# EAGLE board GEYDi_BRD (EAGLE 4.09)
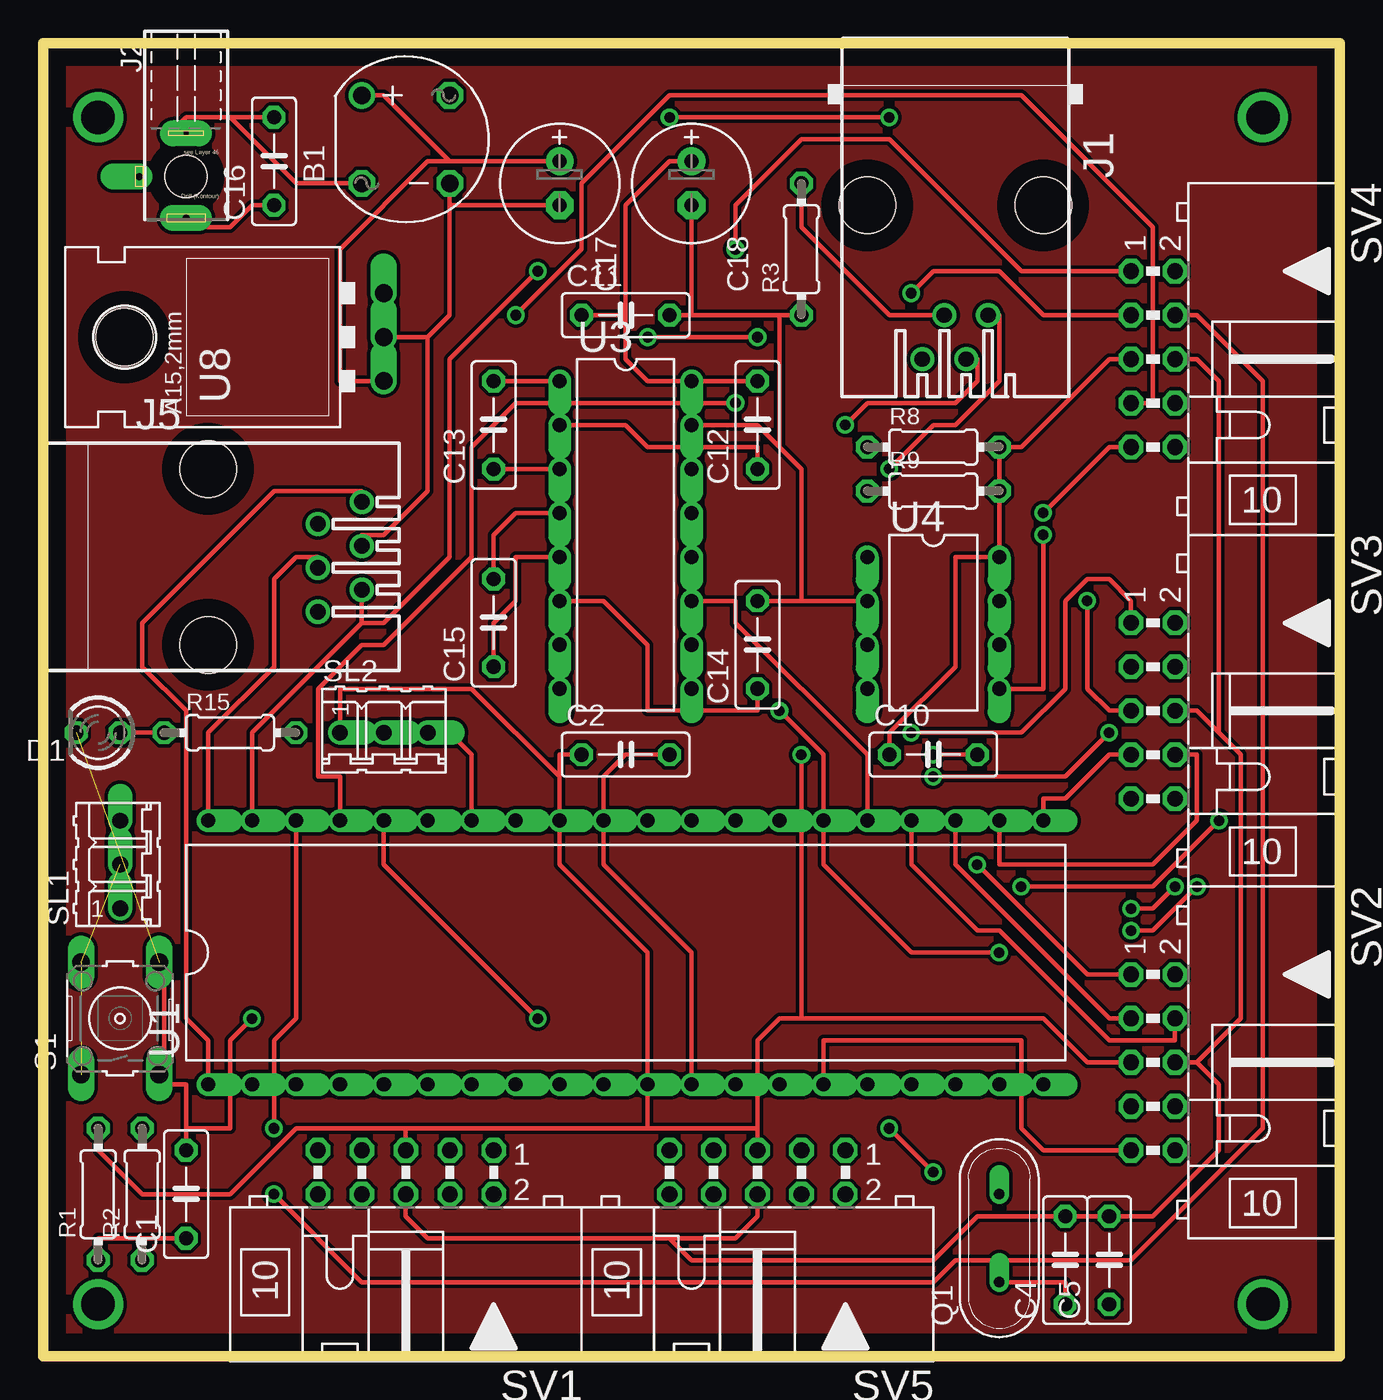
[diagram p0: board, top side]
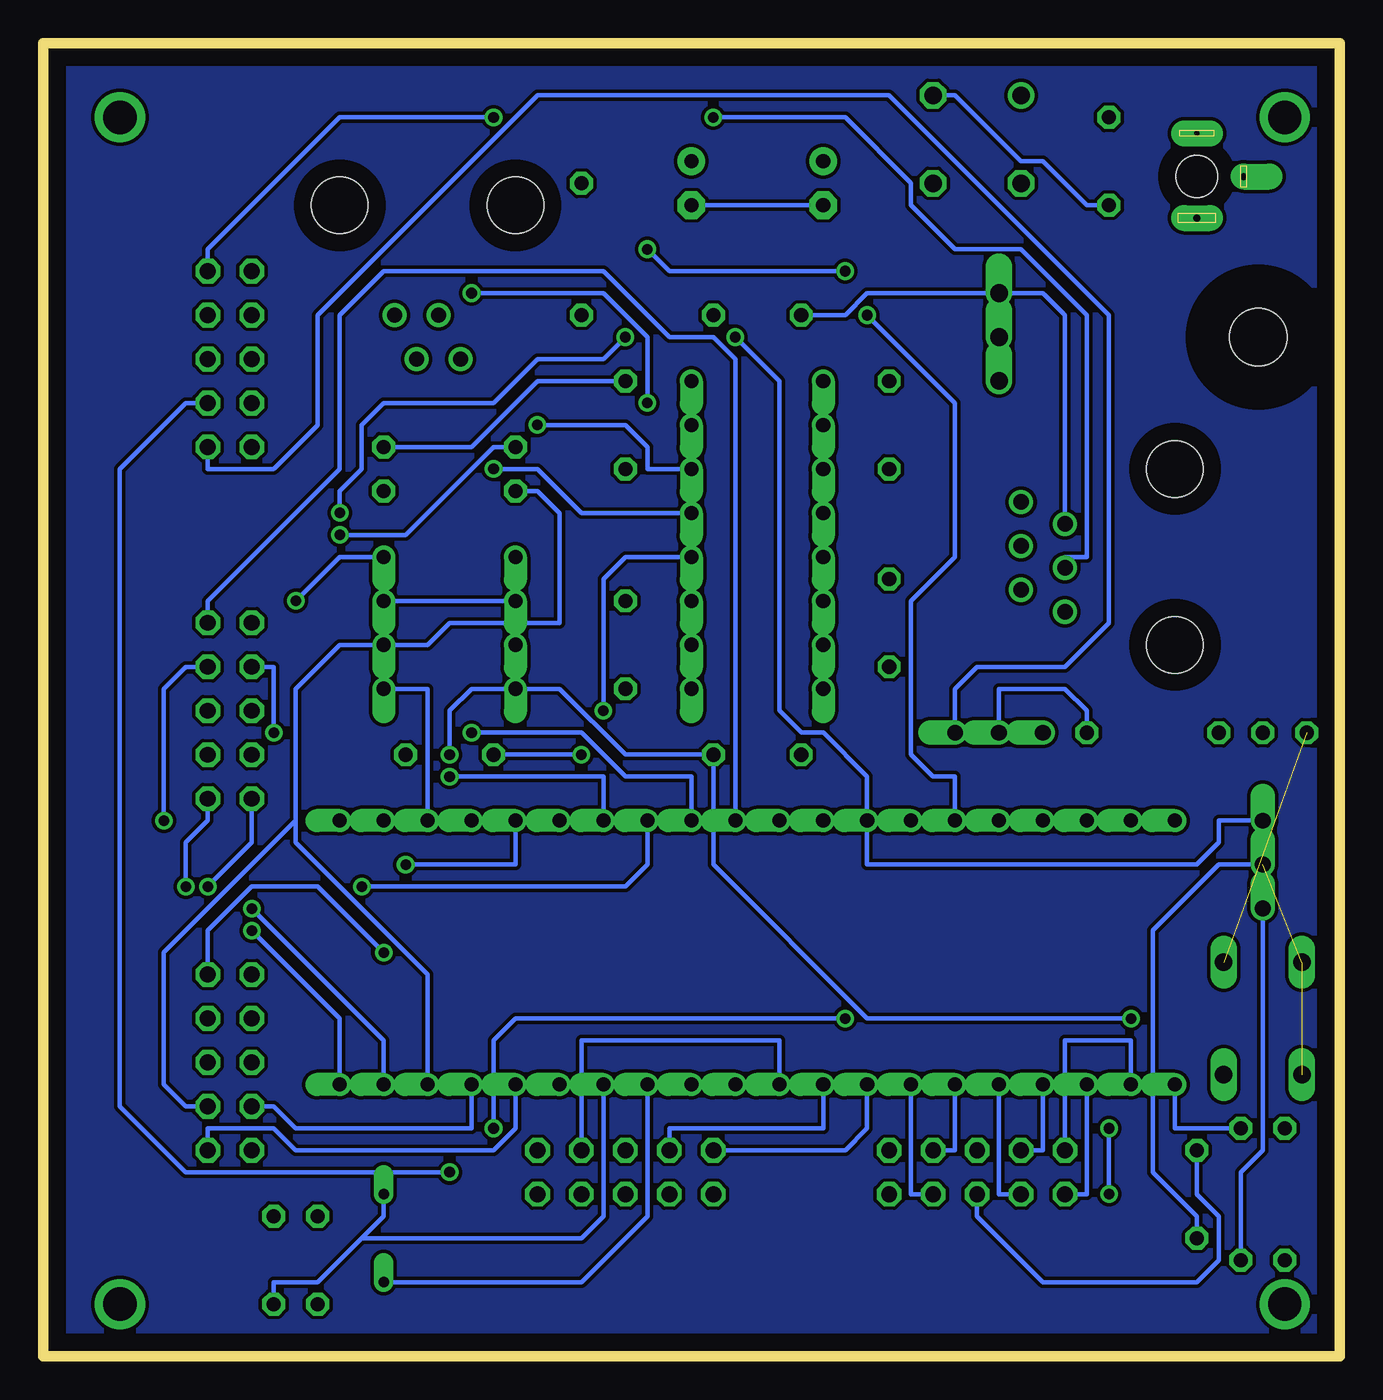
[diagram p1: board, bottom side, seen from below]

Size 74.91 x 75.87 mm. Coordinates in mm from the lower left corner, seen from the top.
Outline: 0,0 74.91,0 74.91,75.87 0,75.87 0,0
Copper layers used: Top, Bottom

## Footprints (pad centres in the part's own frame; a part is rotated, then mirrored left to right if it is on the bottom)
RB1A = drill 1.016 round: + -2.54,2.54 | drill 1.016 octagon: - 2.54,-2.54; AC1 2.54,2.54; AC2 -2.54,-2.54
C050-025X075 = drill 0.813 octagon: 1 -2.54,0; 2 2.54,0
E2,5-7 = drill 0.813 pad 1.6 round: + -1.27,0 | drill 0.813 pad 1.6 octagon: - 1.27,0
LED3MM = drill 0.813 octagon: A -1.27,0; K 1.27,0
520250-2 = drill 0.889 round: 1 -1.905,6.35; 2 -0.635,8.89; 3 0.635,6.35; 4 1.905,8.89 | hole 3.251: -5.08,0; 5.08,0
733989-5 = drill 0.4 pad 1.5 long: 1 0,5.82 | drill 0.3 pad 1.5 long: 2 0,0.92 | drill 0.4 pad 1.5 offset: 3 2.7,3.42 | hole 2.4: 0,3.42
520470-3 = drill 0.889 round: 1 -3.175,8.89; 2 -1.905,6.35; 3 -0.635,8.89; 4 0.635,6.35; 5 1.905,8.89; 6 3.175,6.35 | hole 3.251: -5.08,0; 5.08,0
QS = drill 0.61 offset: 1 -2.54,0; 2 2.54,0
0204/7 = drill 0.813 octagon: 1 -3.81,0; 2 3.81,0
B3F-10XX = drill 1.016 long: 1 -3.251,2.261; 2 3.251,2.261; 3 -3.251,-2.261; 4 3.251,-2.261
03P = drill 0.914 offset: 1 -2.54,0; 2 0,0; 3 2.54,0
ML10L = drill 0.914 octagon: 1 -5.08,-1.27; 2 -5.08,1.27; 3 -2.54,-1.27; 4 -2.54,1.27; 5 0,-1.27; 6 0,1.27; 7 2.54,-1.27; 8 2.54,1.27; 9 5.08,-1.27; 10 5.08,1.27
DIL40 = drill 0.813 offset: 1 -24.13,-7.62; 2 -21.59,-7.62; 3 -19.05,-7.62; 4 -16.51,-7.62; 5 -13.97,-7.62; 6 -11.43,-7.62; 7 -8.89,-7.62; 8 -6.35,-7.62; 9 -3.81,-7.62; 10 -1.27,-7.62; 11 1.27,-7.62; 12 3.81,-7.62; 13 6.35,-7.62; 14 8.89,-7.62; 15 11.43,-7.62; 16 13.97,-7.62; 17 16.51,-7.62; 18 19.05,-7.62; 19 21.59,-7.62; 20 24.13,-7.62; 21 24.13,7.62; 22 21.59,7.62; 23 19.05,7.62; 24 16.51,7.62; 25 13.97,7.62; 26 11.43,7.62; 27 8.89,7.62; 28 6.35,7.62; 29 3.81,7.62; 30 1.27,7.62; 31 -1.27,7.62; 32 -3.81,7.62; 33 -6.35,7.62; 34 -8.89,7.62; 35 -11.43,7.62; 36 -13.97,7.62; 37 -16.51,7.62; 38 -19.05,7.62; 39 -21.59,7.62; 40 -24.13,7.62
DIL16 = drill 0.813 offset: 1 -8.89,-3.81; 2 -6.35,-3.81; 3 -3.81,-3.81; 4 -1.27,-3.81; 5 1.27,-3.81; 6 3.81,-3.81; 7 6.35,-3.81; 8 8.89,-3.81; 9 8.89,3.81; 10 6.35,3.81; 11 3.81,3.81; 12 1.27,3.81; 13 -1.27,3.81; 14 -3.81,3.81; 15 -6.35,3.81; 16 -8.89,3.81
DIL8 = drill 0.813 offset: 1 -3.81,-3.81; 2 -1.27,-3.81; 3 1.27,-3.81; 4 3.81,-3.81; 5 3.81,3.81; 6 1.27,3.81; 7 -1.27,3.81; 8 -3.81,3.81
78XXL = drill 1.016 offset: GND 0,-3.81; IN -2.54,-3.81; OUT 2.54,-3.81 | hole 3.302: 0,11.176

## Placement (x,y rotation side)
B1  [RB1A]  20.95,70.32 0 top
C1  0.1uF  [C050-025X075]  8.25,9.36 90 top
C2  0.1uF  [C050-025X075]  33.65,34.76 0 top
C4  15pF  [C050-025X075]  59.05,5.55 90 top
C5  15pF  [C050-025X075]  61.59,5.55 90 top
C10  0.1uF  [C050-025X075]  51.43,34.76 0 top
C11  0.1uF  [C050-025X075]  33.65,60.16 0 top
C12  0.1uF  [C050-025X075]  41.27,53.81 90 top
C13  0.1uF  [C050-025X075]  26.03,53.81 90 top
C14  0.1uF  [C050-025X075]  41.27,41.11 90 top
C15  0.1uF  [C050-025X075]  26.03,42.38 90 top
C16  0.1uF  [C050-025X075]  13.33,69.05 90 top
C17  220uF  [E2,5-7]  29.84,67.78 270 top
C18  220uF  [E2,5-7]  37.46,67.78 270 top
D1  [LED3MM]  3.17,36.03 180 top
J1  [520250-2]  52.7,66.51 180 top
J2  [733989-5]  8.25,71.59 180 top
J5  [520470-3]  9.52,46.19 270 top
Q1  [QS]  55.24,6.82 90 top
R1  10k  [0204/7]  3.17,9.36 90 top
R2  470  [0204/7]  5.71,9.36 90 top
R3  10ohm  [0204/7]  43.81,63.97 90 top
R8  [0204/7]  51.43,52.54 0 top
R9  4.7k  [0204/7]  51.43,50 0 top
R15  470  [0204/7]  10.79,36.03 0 top
S1  [B3F-10XX]  4.44,19.52 90 top
SL1  [03P]  4.44,28.41 90 top
SL2  [03P]  19.68,36.03 0 top
SV1  [ML10L]  20.95,10.63 180 top
SV2  [ML10L]  64.13,16.98 270 top
SV3  [ML10L]  64.13,37.3 270 top
SV4  [ML10L]  64.13,57.62 270 top
SV5  [ML10L]  41.27,10.63 180 top
U1  PIC18F452P  [DIL40]  33.65,23.33 0 top
U3  MAX232  [DIL16]  33.65,47.46 270 top
U4  24AA256P  [DIL8]  51.43,42.38 270 top
U8  7805  [78XXL]  15.87,58.89 90 top

## Library data of the parts
B1 = rectifier
C1 C2 C4 C5 C10-C18 R1-R3 R8 R9 R15 = rcl
D1 = led
J1 J5 = con-amp
J2 = con-conrad
Q1 = special
S1 = switch-omron
SL1 SL2 = con-amp-quick
SV1-SV5 = con-harting-ml
U1 U4 = microchip
U3 = maxim
U8 = v-reg

## Nets
+5V: C2.1 C10.1 C11.1 C12.2 C18.+ J5.2 R1.2 R8.2 R9.2 SL2.1 SV1.5 SV2.5 SV3.5 SV4.5 SV5.5 U1.11 U1.32 U3.16 U4.8 U8.OUT
GND: B1.- C1.2 C2.2 C4.2 C5.2 C10.2 C11.2 C14.2 C17.- C18.- D1.K J5.3 R3.1 S1.3 S1.4 SV1.6 SV2.6 SV3.6 SV4.6 SV5.6 U1.12 U1.31 U3.15 U4.1 U4.2 U4.3 U4.4 U4.7 U8.GND
MCLR: J5.1 R2.2 U1.1
N$1: D1.A R15.1
N$2: B1.AC2 C16.2 J2.2
N$3: B1.AC1 C16.1 J2.1
N$4: C12.1 U3.2
N$5: C13.2 U3.1
N$6: B1.+ C17.+ U8.IN
N$7: C1.1 R1.1 S1.1 S1.2 SL1.2
N$8: C5.1 Q1.2 U1.14
N$9: C4.1 Q1.1 U1.13
N$10: C13.1 U3.3
N$11: C15.2 U3.4
N$12: C15.1 U3.5
N$14: C14.1 U3.6
N$19: J1.1 U3.13
N$21: J1.2 U3.14
N$22: J1.3 R3.2
N$23: R2.1 SL1.1
N$24: R15.2 SL2.2
RA0: SV1.9 U1.2
RA1: SV1.10 U1.3
RA2: SV1.7 U1.4
RA3: SV1.8 U1.5
RA4: SV1.3 U1.6
RA5: SV1.4 U1.7
RB0: SL1.3 SV4.9 U1.33
RB1: SL2.3 SV4.10 U1.34
RB2: SV4.7 U1.35
RB3: SV4.8 U1.36
RB4: SV4.3 U1.37
RB5: SV4.4 U1.38
RB6: J5.5 SV4.1 U1.39
RB7: J5.4 SV4.2 U1.40
RC0: SV2.9 U1.15
RC1: SV2.10 U1.16
RC2: SV2.7 U1.17
RC5: SV2.4 U1.24
RD0: SV3.9 U1.19
RD1: SV3.10 U1.20
RD2: SV3.7 U1.21
RD3: SV3.8 U1.22
RD4: SV3.3 U1.27
RD5: SV3.4 U1.28
RD6: SV3.1 U1.29
RD7: SV3.2 U1.30
RE0: SV5.9 U1.8
RE1: SV5.7 U1.9
RE2: SV5.3 U1.10
RX: SV2.2 U1.26 U3.12
SCL: R9.1 SV2.8 U1.18 U4.6
SDA: R8.1 SV2.3 U1.23 U4.5
TX: SV2.1 U1.25 U3.11

## Tracks (layer width: path | path; a pad name or v marks a point on that pad's centre or on a via)
+5V  (via drill 0.61)
  Top 0.254: C10.1 48.89,36.03 52.7,39.84 52.7,46.19 U4.8 R9.2 R8.2 56.51,52.54 61.59,57.62 SV4.5 | SV3.5 61.59,37.3 60.32,38.57 v60.32,43.65 | C12.2 U3.16 34.92,56.35 33.65,57.62 33.65,60.16 | C18.+ 36.19,69.05 33.65,66.51 33.65,60.16 | 33.65,60.16 C11.1 | R1.2 3.17,11.9 5.71,9.36 10.79,9.36 14.6,13.17 20.95,13.17 | 20.95,13.17 SV1.5 | C2.1 29.84,34.76 29.84,33.49 | 29.84,33.49 U1.32 29.84,28.41 34.92,23.33 U1.11 34.92,13.17 | 29.84,33.49 24.76,38.57 17.14,38.57 SL2.1 | 41.27,13.17 SV5.5 | 34.92,13.17 41.27,13.17 | SV2.5 60.32,16.98 57.78,19.52 43.81,19.52 | 43.81,19.52 42.54,19.52 41.27,18.25 41.27,13.17 | 20.95,13.17 34.92,13.17 | 43.81,19.52 v43.81,34.76
  Bottom 0.254: v60.32,43.65 57.78,46.19 U4.8 | C11.1 28.57,60.16 27.3,61.43 U8.OUT 17.14,61.43 15.87,60.16 J5.2 | R8.2 50.16,52.54 46.35,56.35 C12.2 | v43.81,34.76 C10.1
GND  (via drill 0.61)  (1 unrouted)
  Top 0.254: 22.22,58.89 22.22,50 19.68,47.46 18.41,47.46 J5.3 | 22.22,58.89 U8.GND | 23.49,66.51 23.49,60.16 22.22,58.89 | 23.49,66.51 B1.- | C17.- 23.49,66.51 | C2.2 33.65,34.76 32.38,33.49 U1.31 32.38,28.41 37.46,23.33 U1.12 | 42.54,60.16 R3.1 | 42.54,60.16 37.46,60.16 | 37.46,60.16 C11.2 | 37.46,60.16 C18.- | U4.4 U4.3 U4.2 | v51.43,34.76 C10.2 | 43.81,43.65 C14.2 | U4.2 43.81,43.65 | U4.2 U4.1 | 42.54,52.54 43.81,51.27 43.81,43.65 | 42.54,52.54 41.27,53.81 U3.15 | 42.54,52.54 42.54,60.16 | 8.25,13.17 8.25,15.71 6.98,15.71 S1.3 6.98,16.98 6.98,22.06 S1.4 | C1.2 8.25,13.17 | SV1.6 20.95,8.09 22.22,6.82 36.19,6.82 | 36.19,6.82 40,6.82 41.27,8.09 SV5.6 | 66.67,16.98 SV2.6 | 66.67,16.98 67.94,15.71 67.94,11.9 64.13,8.09 C5.2 C4.2 53.97,8.09 51.43,5.55 37.46,5.55 36.19,6.82 | SV3.6 66.67,37.3 67.94,36.03 | 67.94,36.03 69.21,34.76 69.21,19.52 66.67,16.98 | SV4.6 66.67,57.62 67.94,56.35 67.94,36.03 | v12.06,19.52 10.79,18.25 10.79,13.17 8.25,13.17
  Bottom 0.254: v51.43,34.76 51.43,37.3 50.16,38.57 U4.4 45.08,38.57 41.27,34.76 C2.2 36.19,28.41 27.3,19.52 v12.06,19.52 | U4.2 U4.7 | C18.- C17.- | C1.2 8.25,9.36 6.98,8.09 6.98,5.55 8.25,4.28 17.14,4.28 20.95,8.09 SV1.6
MCLR
  Top 0.254: J5.1 18.41,50 13.33,50 5.71,42.38 5.71,39.84 8.25,37.3 8.25,19.52 9.52,18.25 U1.1
  Bottom 0.254: R2.2 9.52,13.17 U1.1
N$1
  Top 0.254: D1.A R15.1
N$2
  Top 0.254: 10.79,71.59 8.25,71.59 6.98,70.32 J2.2 | 10.79,71.59 C16.2 | B1.AC2 14.6,67.78 10.79,71.59
N$3
  Top 0.254: C16.1 12.06,66.51 10.79,65.24 9.52,65.24 J2.1
  Bottom 0.254: B1.AC1 22.22,72.86 18.41,69.05 17.14,69.05 14.6,66.51 C16.1
N$4
  Top 0.254: C12.1 41.27,52.54 34.92,52.54 33.65,53.81 U3.2
N$5
  Top 0.254: C13.2 U3.1
N$6
  Top 0.254: 23.49,69.05 C17.+ | 23.49,69.05 22.22,69.05 17.14,63.97 17.14,56.35 U8.IN | B1.+ 19.68,72.86 23.49,69.05
N$7  (2 unrouted)
  Top 0.254: R1.1 3.17,6.82 C1.1
  Bottom 0.254: C1.1 8.25,8.09 10.79,10.63 10.79,24.6 6.98,28.41 SL1.2
N$8
  Bottom 0.254: Q1.2 55.24,8.09 56.51,6.82 | 56.51,6.82 59.05,4.28 61.59,4.28 C5.1 | 56.51,6.82 43.81,6.82 42.54,8.09 U1.14
N$9
  Top 0.254: Q1.1 59.05,4.28 C4.1
  Bottom 0.254: Q1.1 43.81,4.28 40,8.09 U1.13
N$10
  Top 0.254: C13.1 U3.3
N$11
  Top 0.254: C15.2 26.03,47.46 27.3,48.73 U3.4
N$12
  Top 0.254: C15.1 26.03,42.38 27.3,43.65 27.3,46.19 U3.5
N$13  (via drill 1.93 pad 2.18)
  other vias: 3.17,71.59
N$14
  Top 0.254: C14.1 41.27,37.3 34.92,37.3 34.92,41.11 32.38,43.65 U3.6
N$15  (via drill 1.93 pad 2.18)
  other vias: 70.48,71.59
N$16  (via drill 1.93 pad 2.18)
  other vias: 3.17,3.01
N$17  (via drill 1.93 pad 2.18)
  other vias: 70.48,3.01
N$18
  pour Bottom (no thermals): 0.63,75.4 74.29,75.4 74.29,0.47 -0.64,0.47 -0.64,75.4
N$19  (via drill 0.61)
  Top 0.254: v48.89,51.27 51.43,53.81 52.7,53.81 55.24,56.35 55.24,60.16 J1.1
  Bottom 0.254: v48.89,51.27 46.35,51.27 43.81,48.73 U3.13
N$20
  pour Top (no thermals): 0.63,75.4 74.29,75.4 74.29,0.47 -0.64,0.47 -0.64,-0.8 -0.64,75.4
N$21  (via drill 0.61)
  Top 0.254: v46.35,53.81 47.62,55.08 52.7,55.08 53.97,56.35 53.97,57.62 J1.2
  Bottom 0.254: v46.35,53.81 41.27,53.81 40,52.54 40,51.27 U3.14
N$22
  Top 0.254: R3.2 43.81,65.24 48.89,60.16 J1.3
N$23
  Bottom 0.254: R2.1 5.71,10.63 4.44,11.9 SL1.1
N$24
  Bottom 0.254: R15.2 14.6,37.3 15.87,38.57 19.68,38.57 SL2.2
RA0
  Bottom 0.254: SV1.9 15.87,18.25 12.06,18.25 U1.2
RA1
  Bottom 0.254: SV1.10 14.6,9.36 U1.3
RA2
  Bottom 0.254: SV1.7 17.14,11.9 U1.4
RA3
  Bottom 0.254: SV1.8 19.68,9.36 U1.5
RA4
  Bottom 0.254: SV1.3 22.22,11.9 U1.6
RA5
  Bottom 0.254: SV1.4 24.76,9.36 U1.7
RB0  (via drill 0.61)
  Top 0.254: SV4.9 61.59,52.54 v57.78,48.73 | v34.92,58.89 v41.27,58.89
  Bottom 0.254: SL1.3 6.98,30.95 6.98,29.68 8.25,28.41 27.3,28.41 U1.33 27.3,33.49 29.84,36.03 31.11,36.03 32.38,37.3 32.38,56.35 v34.92,58.89 | v57.78,48.73 57.78,50 56.51,51.27 56.51,53.81 55.24,55.08 48.89,55.08 46.35,57.62 42.54,57.62 v41.27,58.89
RB1
  Top 0.254: SL2.3 23.49,36.03 24.76,34.76 U1.34
  Bottom 0.254: SV4.10 65.4,51.27 61.59,51.27 59.05,53.81 59.05,60.16 46.35,72.86 26.03,72.86 13.33,60.16 13.33,42.38 15.87,39.84 20.95,39.84 22.22,38.57 SL2.3
RB2  (via drill 0.61)
  Top 0.254: v27.3,60.16 31.11,63.97 31.11,67.78 36.19,72.86 56.51,72.86 64.13,65.24 64.13,55.08 SV4.7
  Bottom 0.254: v27.3,60.16 22.22,55.08 22.22,46.19 24.76,43.65 24.76,34.76 23.49,33.49 22.22,33.49 U1.35
RB3  (via drill 0.61)
  Top 0.254: v28.57,19.52 19.68,28.41 U1.36 | v48.89,13.17 v51.43,10.63
  Bottom 0.254: v28.57,19.52 47.62,19.52 48.89,18.25 v48.89,13.17 | v51.43,10.63 66.67,10.63 70.48,14.44 70.48,51.27 66.67,55.08 SV4.8
RB4  (via drill 0.61)
  Top 0.254: v40,55.08 27.3,55.08 24.76,52.54 24.76,46.19 19.68,41.11 18.41,41.11 15.87,38.57 15.87,33.49 17.14,33.49 U1.37 | v50.16,61.43 51.43,62.7 55.24,62.7 57.78,60.16 SV4.3
  Bottom 0.254: v40,55.08 40,58.89 42.54,61.43 v50.16,61.43
RB5  (via drill 0.61)
  Top 0.254: v13.33,13.17 13.33,18.25 14.6,19.52 U1.38 | v13.33,9.36 18.41,4.28 51.43,4.28 52.7,5.55 62.86,5.55 70.48,13.17 70.48,56.35 66.67,60.16 SV4.4
  Bottom 0.254: v13.33,9.36 v13.33,13.17
RB6  (via drill 0.61)
  Top 0.254: 18.41,42.38 12.06,36.03 U1.39 | 18.41,42.38 J5.5 | SV4.1 56.51,62.7 48.89,70.32 43.81,70.32 40,66.51 v40,63.97 | v28.57,62.7 23.49,57.62 23.49,46.19 19.68,42.38 18.41,42.38
  Bottom 0.254: v40,63.97 38.73,62.7 v28.57,62.7
RB7  (via drill 0.61)
  Top 0.254: U1.40 9.52,36.03 13.33,39.84 13.33,44.92 14.6,46.19 15.87,46.19 J5.4 | v36.19,71.59 v48.89,71.59
  Bottom 0.254: SV4.2 65.4,63.97 57.78,71.59 v48.89,71.59 | v36.19,71.59 28.57,71.59 24.76,67.78 24.76,66.51 22.22,63.97 18.41,63.97 14.6,60.16 14.6,46.19 15.87,46.19 J5.4
RC0
  Top 0.254: SV2.9 57.78,11.9 56.51,13.17 56.51,18.25 45.08,18.25 U1.15
RC1
  Bottom 0.254: SV2.10 65.4,13.17 61.59,13.17 60.32,11.9 48.89,11.9 47.62,13.17 U1.16
RC2
  Bottom 0.254: SV2.7 61.59,14.44 60.32,13.17 50.16,13.17 U1.17
RC5
  Top 0.254: SV2.4 65.4,18.25 61.59,18.25 55.24,24.6 53.97,24.6 50.16,28.41 U1.24
RD0  (via drill 0.61)
  Top 0.254: v62.86,25.87 64.13,25.87 v65.4,27.14
  Bottom 0.254: v62.86,25.87 55.24,18.25 U1.19 | v65.4,27.14 62.86,29.68 SV3.9
RD1  (via drill 0.61)
  Top 0.254: v62.86,24.6 64.13,24.6 v66.67,27.14
  Bottom 0.254: v62.86,24.6 57.78,19.52 U1.20 | v66.67,27.14 66.67,29.68 65.4,30.95 SV3.10
RD2
  Top 0.254: SV3.7 61.59,34.76 59.05,32.22 57.78,32.22 U1.21
RD3
  Top 0.254: SV3.8 66.67,34.76 66.67,30.95 64.13,28.41 55.24,28.41 U1.22
RD4  (via drill 0.61)
  Top 0.254: v51.43,33.49 59.05,33.49 v61.59,36.03
  Bottom 0.254: v51.43,33.49 42.54,33.49 U1.27 | v61.59,36.03 61.59,39.84 SV3.3
RD5  (via drill 0.61)
  Top 0.254: v56.51,27.14 64.13,27.14 v67.94,30.95
  Bottom 0.254: v56.51,27.14 41.27,27.14 40,28.41 U1.28 | v67.94,30.95 67.94,38.57 66.67,39.84 SV3.4
RD6  (via drill 0.61)
  Top 0.254: v50.16,36.03 56.51,36.03 59.05,38.57 59.05,43.65 60.32,44.92 61.59,44.92 62.86,43.65 SV3.1
  Bottom 0.254: v50.16,36.03 43.81,36.03 41.27,33.49 37.46,33.49 U1.29
RD7
  Bottom 0.254: SV3.2 65.4,43.65 57.78,51.27 57.78,60.16 55.24,62.7 42.54,62.7 38.73,58.89 36.19,58.89 34.92,57.62 U1.30
RE0
  Bottom 0.254: SV5.9 28.57,11.9 27.3,13.17 U1.8
RE1
  Bottom 0.254: SV5.7 38.73,13.17 29.84,13.17 U1.9
RE2
  Bottom 0.254: SV5.3 43.81,18.25 32.38,18.25 U1.10
RX  (via drill 0.61)
  Top 0.254: v42.54,37.3 45.08,34.76 U1.26 45.08,28.41 50.16,23.33 v55.24,23.33
  Bottom 0.254: v42.54,37.3 42.54,44.92 41.27,46.19 U3.12 | SV2.2 65.4,24.6 62.86,27.14 59.05,27.14 v55.24,23.33
SCL
  Bottom 0.254: 60.32,30.95 60.32,38.57 57.78,41.11 U4.6 52.7,41.11 51.43,42.38 45.08,42.38 45.08,48.73 46.35,50 R9.1 | 60.32,30.95 60.32,29.68 52.7,22.06 U1.18 | SV2.8 66.67,14.44 67.94,15.71 67.94,23.33 60.32,30.95
SDA  (via drill 0.61)
  Top 0.254: v57.78,47.46 57.78,38.57 U4.5 | SV2.3 61.59,19.52 52.7,28.41 U1.23
  Bottom 0.254: U1.23 52.7,38.57 U4.5 | R8.1 48.89,52.54 53.97,47.46 v57.78,47.46
TX  (via drill 0.61)
  Top 0.254: U1.25 47.62,34.76 40,42.38 40,43.65 U3.11 | SV2.1 60.32,22.06 v53.97,28.41
  Bottom 0.254: v53.97,28.41 47.62,28.41 U1.25